# EAGLE board RyanWalkowiakLab3 (EAGLE 9.6.2)
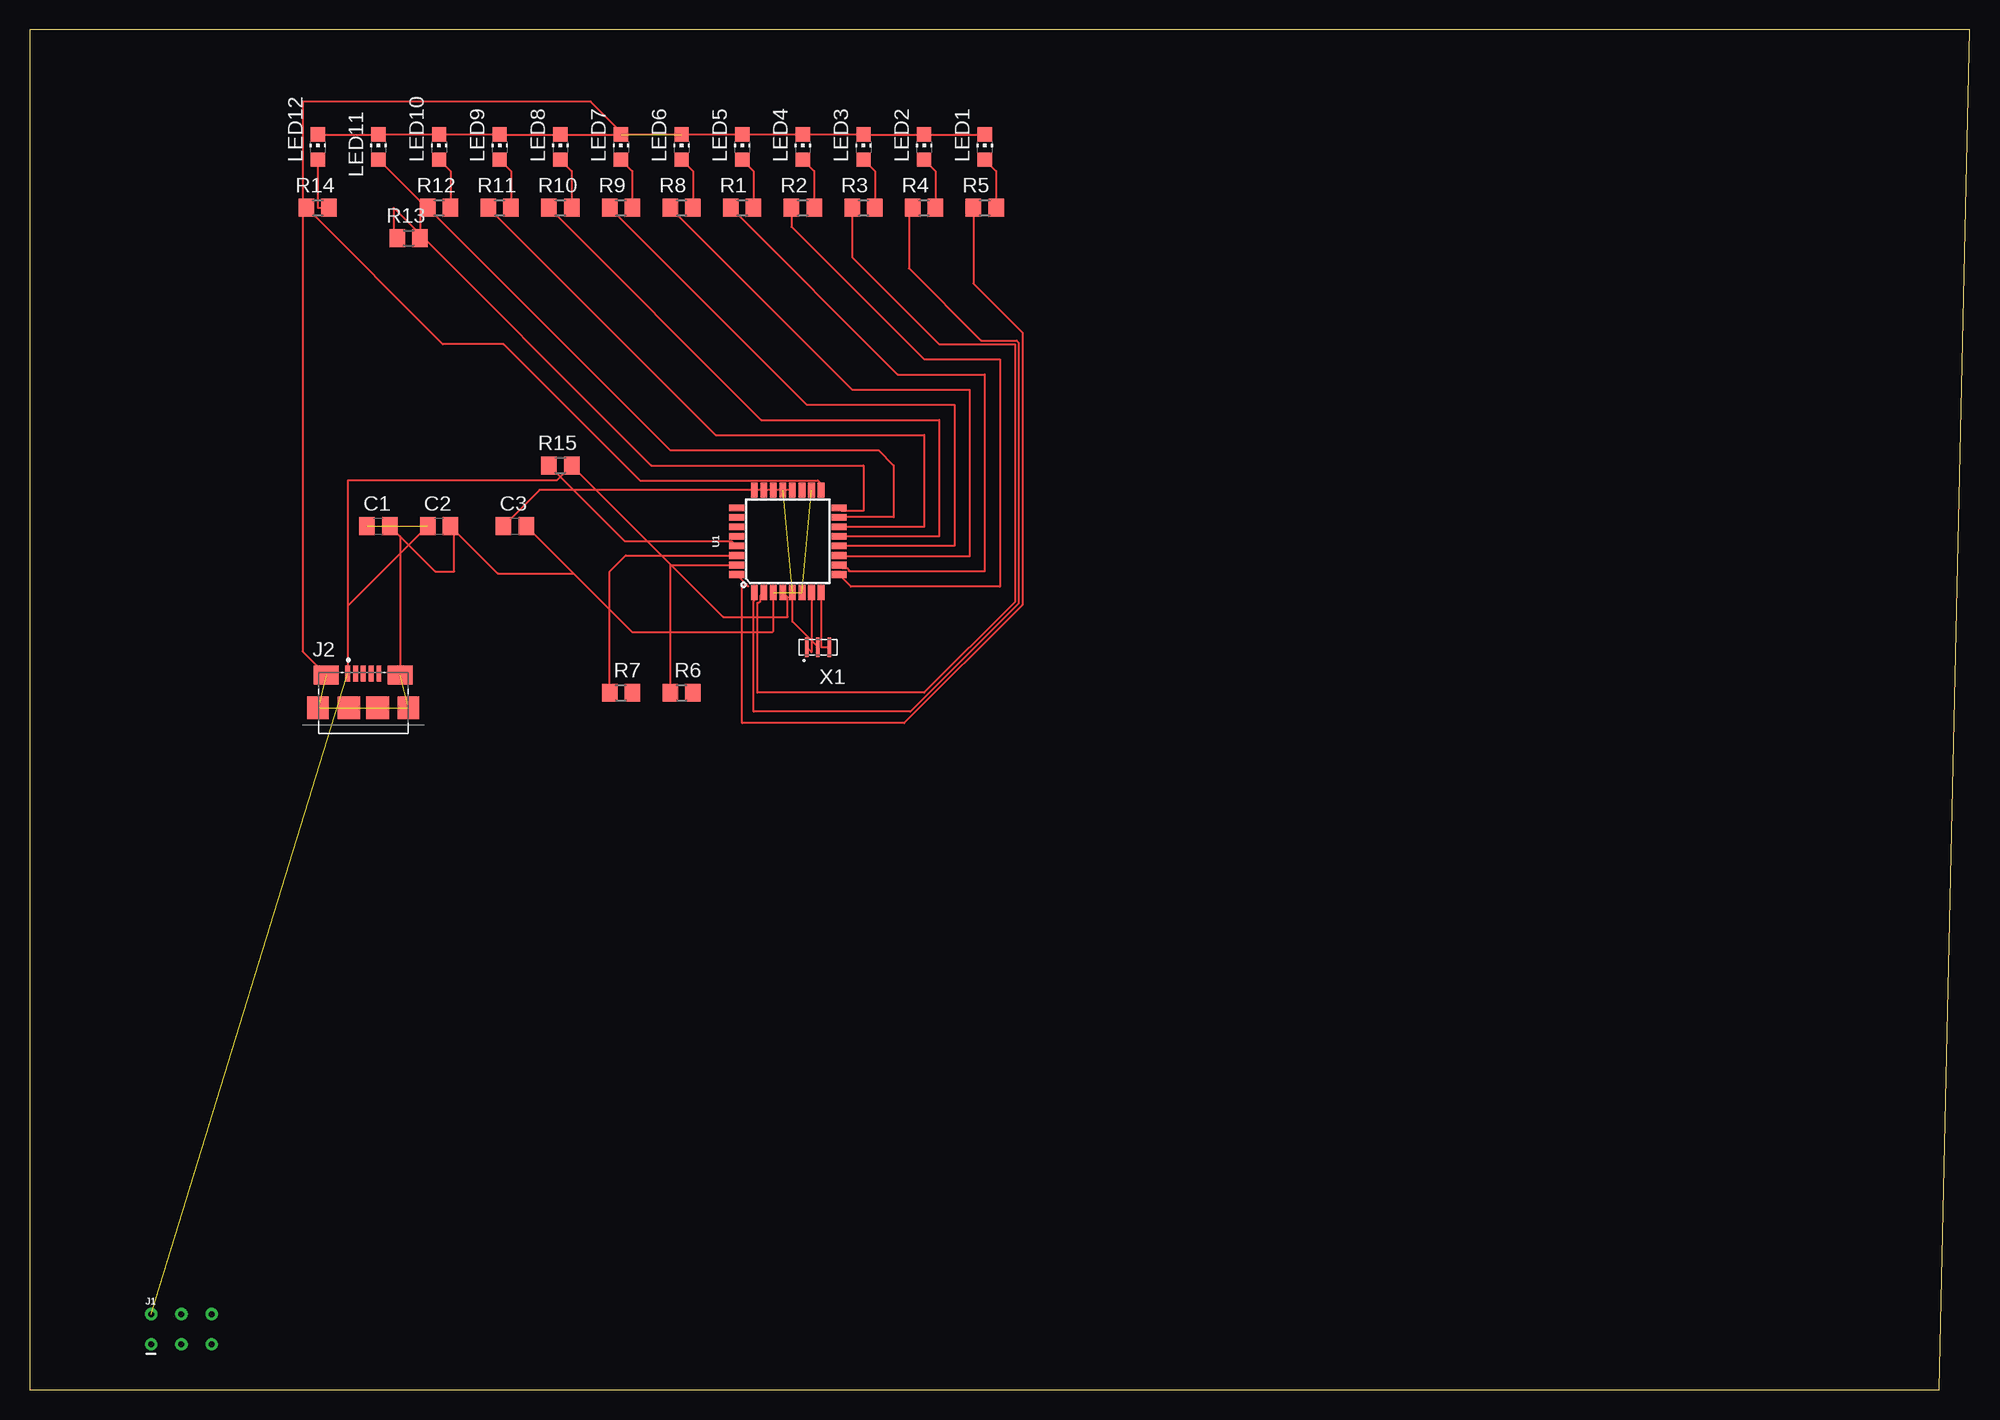
[diagram p0: board, top side]
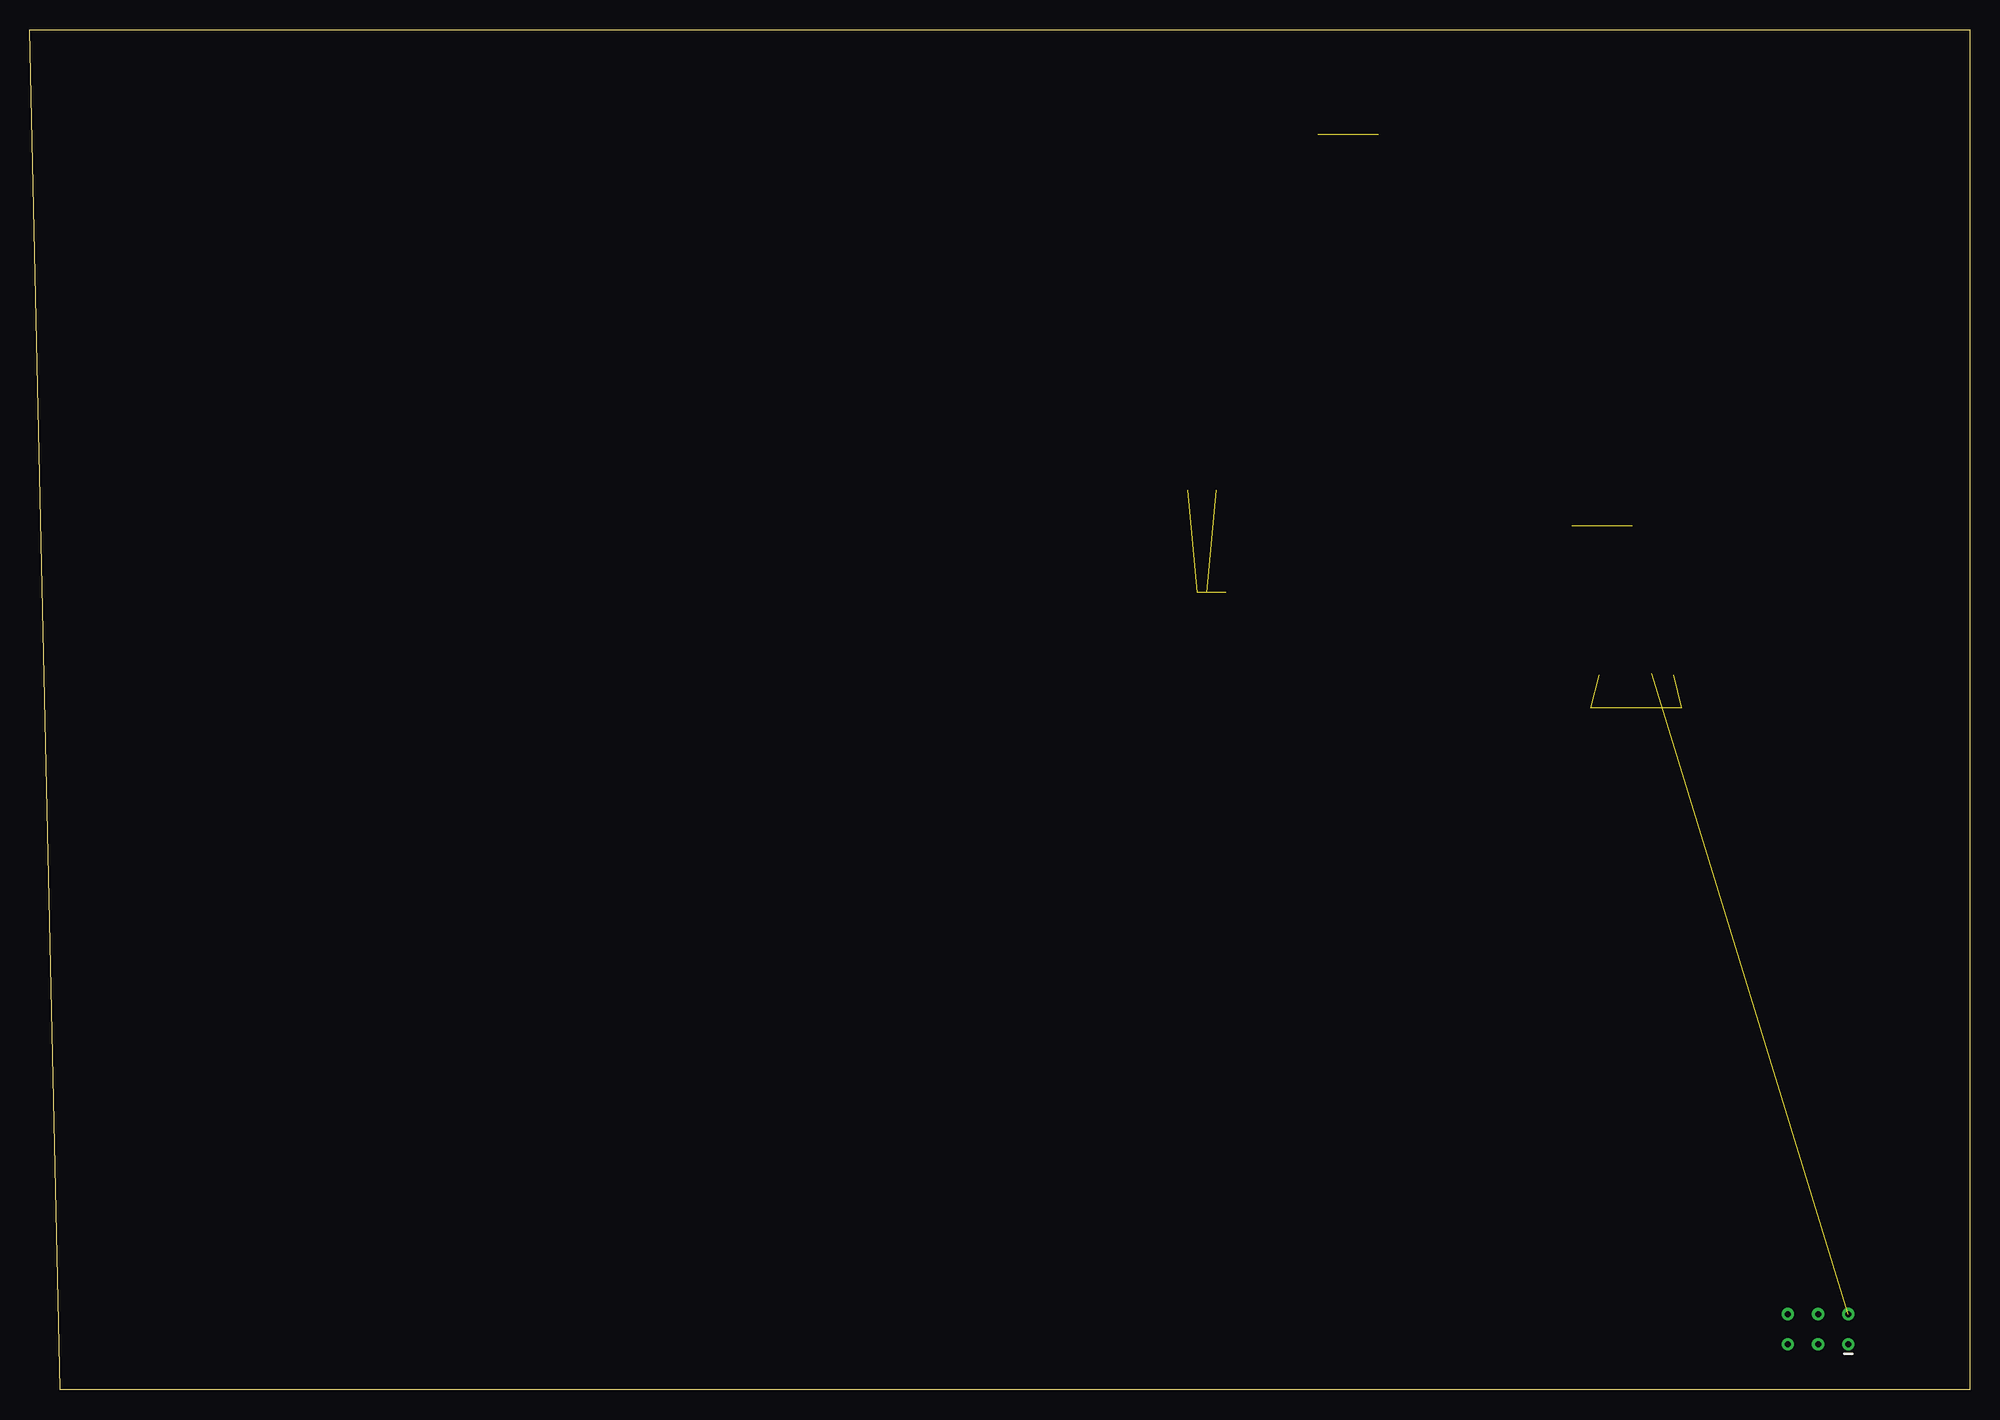
[diagram p1: board, bottom side, seen from below]

Size 162.54 x 113.97 mm. Coordinates in mm from the lower left corner, seen from the top.
Outline: 0,0 160,0 162.54,113.97 0,113.97 0,0
Copper layers (1*16): Top 0.035mm / dielectric 1.5mm / Bottom 0.035mm
Design rules "default": minimum track width 6mil, minimum drill 0.35mm, track to track 6mil, track to pad 6mil, pad to pad 6mil, via to via 6mil, smd to smd 6mil, copper to edge 40mil, drill to drill 6mil, minimum pad ring 10mil, minimum via ring 8mil, stop-mask expansion 4mil, vias tented up to drill 0mil, thermal gap 10mil

## Footprints (pad centres in the part's own frame; a part is rotated, then mirrored left to right if it is on the bottom)
C0805 = smd 1.3 x 1.5: 1 -0.95,0; 2 0.95,0
2X3_TEST_POINTS = drill 0.508: 1 -2.54,-1.27; 2 -2.54,1.27; 3 0,-1.27; 4 0,1.27; 5 2.54,-1.27; 6 2.54,1.27
10118192-0002LF = smd 0.4 x 1.35: 1 -1.3,2.875; 2 -0.65,2.875; 3 0,2.875; 4 0.65,2.875; 5 1.3,2.875 | smd 2.1 x 1.6: SH1 -3.1,2.75; SH2 3.1,2.75 | smd 1.8 x 1.9: SH3 -3.8,0; SH4 3.8,0 | smd 1.9 x 1.9: SH5 -1.2,0; SH6 1.2,0
CHIP-LED0805 = smd 1.2 x 1.2: A 0,-1.05; C 0,1.05
R0805 = smd 1.3 x 1.5: 1 -0.95,0; 2 0.95,0
TQFP32-08 = smd 1.27 x 0.559: 1 -4.293,2.8; 2 -4.293,2; 3 -4.293,1.2; 4 -4.293,0.4; 5 -4.293,-0.4; 6 -4.293,-1.2; 7 -4.293,-2; 8 -4.293,-2.8; 17 4.293,-2.8; 18 4.293,-2; 19 4.293,-1.2; 20 4.293,-0.4; 21 4.293,0.4; 22 4.293,1.2; 23 4.293,2; 24 4.293,2.8 | smd 0.559 x 1.27: 9 -2.8,-4.293; 10 -2,-4.293; 11 -1.2,-4.293; 12 -0.4,-4.293; 13 0.4,-4.293; 14 1.2,-4.293; 15 2,-4.293; 16 2.8,-4.293; 25 2.8,4.293; 26 2,4.293; 27 1.2,4.293; 28 0.4,4.293; 29 -0.4,4.293; 30 -1.2,4.293; 31 -2,4.293; 32 -2.8,4.293
CSTCE16M0V53-R0 = smd 0.3 x 1.6: 1 0.95,0; 2 0,0; 3 -0.95,0

## Placement (x,y rotation side)
C1  1uF  [C0805]  29.21,72.39 0 top
C2  1uF  [C0805]  34.29,72.39 0 top
C3  1uF  [C0805]  40.64,72.39 0 top
FRAME1  FRAME-LETTERNO_PACKAGE  [DUMMY]  -44.45,43.18 0 top  (outside the outline)
J1  AVR_SPI_PROG_3X2TESTPOINTS  [2X3_TEST_POINTS]  12.7,5.08 0 top
J2  10118192-0002LF  [10118192-0002LF]  27.94,57.15 0 top
LED1  [CHIP-LED0805]  80.01,104.14 0 top
LED2  [CHIP-LED0805]  74.93,104.14 0 top
LED3  [CHIP-LED0805]  69.85,104.14 0 top
LED4  [CHIP-LED0805]  64.77,104.14 0 top
LED5  [CHIP-LED0805]  59.69,104.14 0 top
LED6  [CHIP-LED0805]  54.61,104.14 0 top
LED7  [CHIP-LED0805]  49.53,104.14 0 top
LED8  [CHIP-LED0805]  44.45,104.14 0 top
LED9  [CHIP-LED0805]  39.37,104.14 0 top
LED10  [CHIP-LED0805]  34.29,104.14 0 top
LED11  [CHIP-LED0805]  29.21,104.14 0 top
LED12  [CHIP-LED0805]  24.13,104.14 0 top
R1  1k  [R0805]  59.69,99.06 0 top
R2  1k  [R0805]  64.77,99.06 0 top
R3  1k  [R0805]  69.85,99.06 0 top
R4  1k  [R0805]  74.93,99.06 0 top
R5  1k  [R0805]  80.01,99.06 0 top
R6  1k  [R0805]  54.61,58.42 0 top
R7  1K  [R0805]  49.53,58.42 0 top
R8  1k  [R0805]  54.61,99.06 0 top
R9  1k  [R0805]  49.53,99.06 0 top
R10  1k  [R0805]  44.45,99.06 0 top
R11  1k  [R0805]  39.37,99.06 0 top
R12  1k  [R0805]  34.29,99.06 0 top
R13  1k  [R0805]  31.75,96.52 0 top
R14  1K  [R0805]  24.13,99.06 0 top
R15  1k  [R0805]  44.45,77.47 0 top
U1  ATMEGA328P_TQFP  [TQFP32-08]  63.5,71.12 90 top
X1  16Mhz  [CSTCE16M0V53-R0]  66.04,62.23 180 top

## Library data of the parts
C1-C3 = rcl; SPICEPREFIX: C
FRAME1 = SparkFun-Aesthetics; DESIGNER: Nobody; VERSION: v01
J1 = SparkFun-Connectors
J2 = USB connector; CREATED_BY: PCBLayout.com; DIGIKEY_PARTNO: 609-5379-2-ND; MANUFACTURER: Amphenol ICC (FCI); MPN: 10118192-0002LF
LED1-LED12 = led
R1-R15 = rcl; SPICEPREFIX: R
U1 = SparkFun-IC-Microcontroller; PROD_ID: IC-09069
X1 = Crystals_Oscillators; CREATED_BY: PCBLayout.com; DIGIKEY_PART_NUMBER: 490-1198-2-ND; MANUFACTURER: Murata Electronics North America; MPN: CSTCE16M0V53-R0; PACKAGE: SMD 3

## Nets
0: C1.2 C2.2 C3.2 J2.SH1 J2.SH2 J2.SH3 J2.SH4 J2.SH5 J2.SH6 LED1.C LED2.C LED3.C LED4.C LED5.C LED6.C LED7.C LED8.C LED9.C LED10.C LED11.C LED12.C U1.3 U1.5 U1.21 X1.2
+5V: C1.1 C2.1 J1.2 J2.1 R15.2 U1.4 U1.6 U1.18
D11: J1.4
D12: J1.1
GND: J1.6
N$1: R7.1 U1.30
N$2: R6.1 U1.31
N$3: R5.1 U1.32
N$4: R4.1 U1.1
N$5: R3.1 U1.2
N$6: R2.1 U1.9
N$7: R1.1 U1.10
N$8: R8.1 U1.11
N$9: R9.1 U1.12
N$10: R10.1 U1.13
N$11: R11.1 U1.14
N$12: R12.1 U1.15
N$13: R13.1 U1.16
N$14: R14.1 U1.17
N$15: LED1.A R5.2
N$16: LED3.A R3.2
N$17: LED5.A R1.2
N$18: LED7.A R9.2
N$19: LED9.A R11.2
N$20: LED11.A R13.2
N$21: LED2.A R4.2
N$22: R15.1 U1.29
N$23: C3.1 U1.20
N$24: LED4.A R2.2
N$25: LED6.A R8.2
N$26: LED8.A R10.2
N$27: LED10.A R12.2
N$28: LED12.A R14.2
N$30: U1.7 X1.1
N$31: U1.8 X1.3
RESET: J1.5
RX1: R6.2
SCK: J1.3
TXD: R7.2

## Tracks (layer width: path | path; a pad name or v marks a point on that pad's centre or on a via)
0  (8 unrouted)
  Top 0.152: C3.2 45.56,68.42 | 45.56,68.42 50.48,63.5 62.23,63.5 62.3,63.57 U1.3 | LED12.C LED11.C LED10.C LED9.C LED8.C LED7.C | J2.SH1 22.86,61.88 22.86,107.95 46.99,107.95 49.75,105.19 LED6.C LED5.C LED4.C LED3.C LED2.C LED1.C | J2.SH2 31.04,71.51 C1.2 33.97,68.58 35.56,68.58 35.56,72.07 | 35.56,72.07 39.21,68.42 45.56,68.42 | 35.56,72.07 C2.2 | X1.2 63.9,64.37 U1.5
+5V  (4 unrouted)
  Top 0.152: U1.4 63.5,66.43 63.5,64.77 58.1,64.77 R15.2 44.13,76.2 26.64,76.2 J2.1 26.64,65.69 C2.1
N$1
  Top 0.152: R7.1 48.58,68.58 49.92,69.92 U1.30
N$2
  Top 0.152: R6.1 53.66,69.12 U1.31
N$3
  Top 0.152: U1.32 59.95,67.57 | 59.95,67.57 60.19,67.33 | R5.1 79.06,92.71 83.16,88.61 83.16,65.79 73.25,55.88 59.69,55.88 59.69,67.31 59.95,67.57
N$4
  Top 0.152: R4.1 73.66,98.74 73.66,93.98 79.7,87.94 82.68,87.94 82.86,87.76 82.86,65.91 73.79,56.84 60.66,56.84 60.66,66.09 60.7,66.14 U1.1
N$5
  Top 0.152: R3.1 68.9,94.93 76.2,87.63 82.55,87.63 82.55,66.04 74.93,58.42 60.96,58.42 60.96,65.96 61.07,65.96 61.21,66.1 61.21,66.53 U1.2
N$6
  Top 0.152: R2.1 63.82,97.47 74.93,86.36 81.28,86.36 81.28,67.31 68.8,67.31 U1.9
N$7
  Top 0.152: R1.1 72.71,85.09 80.01,85.09 80.01,68.58 68.66,68.58 68.66,68.69 68.52,68.83 68.08,68.83 U1.10
N$8
  Top 0.152: R8.1 68.9,83.82 78.74,83.82 78.74,69.85 67.79,69.85 U1.11
N$9
  Top 0.152: R9.1 65.09,82.55 77.47,82.55 77.47,70.72 U1.12
N$10
  Top 0.152: R10.1 61.28,81.28 76.2,81.28 76.2,71.52 U1.13
N$11
  Top 0.152: R11.1 57.47,80.01 74.93,80.01 74.93,72.32 U1.14
N$12
  Top 0.152: R12.1 53.66,78.74 71.12,78.74 72.39,77.47 72.39,73.12 U1.15
N$13
  Top 0.152: R13.1 30.48,96.84 30.48,99.06 52.07,77.47 69.85,77.47 69.85,73.66 68.05,73.66 U1.16
N$14
  Top 0.152: R14.1 34.61,87.63 39.69,87.63 51.12,76.2 66.04,76.2 66.3,75.94 U1.17
N$15
  Top 0.152: LED1.A 80.96,102.14 R5.2
N$16
  Top 0.152: LED3.A 70.8,102.14 R3.2
N$17
  Top 0.152: LED5.A 60.64,102.14 R1.2
N$18
  Top 0.152: LED7.A 50.48,102.14 R9.2
N$19
  Top 0.152: LED9.A 40.32,102.14 R11.2
N$20
  Top 0.152: LED11.A 32.7,99.6 R13.2
N$21
  Top 0.152: LED2.A 75.88,102.14 R4.2
N$22
  Top 0.152: R15.1 49.85,71.12 58.81,71.12 U1.29
N$23
  Top 0.152: C3.1 42.71,75.41 U1.20
N$24
  Top 0.152: LED4.A 65.72,102.14 R2.2
N$25
  Top 0.152: LED6.A 55.56,102.14 R8.2
N$26
  Top 0.152: LED8.A 45.4,102.14 R10.2
N$27
  Top 0.152: LED10.A 35.24,102.14 R12.2
N$28
  Top 0.152: LED12.A 24.13,99.06 R14.2
N$30
  Top 0.152: X1.1 65.5,61.82 U1.7
N$31
  Top 0.152: U1.8 66.3,62.23 X1.3